# EAGLE board pov-yoyo-0.1 (EAGLE 5.11)
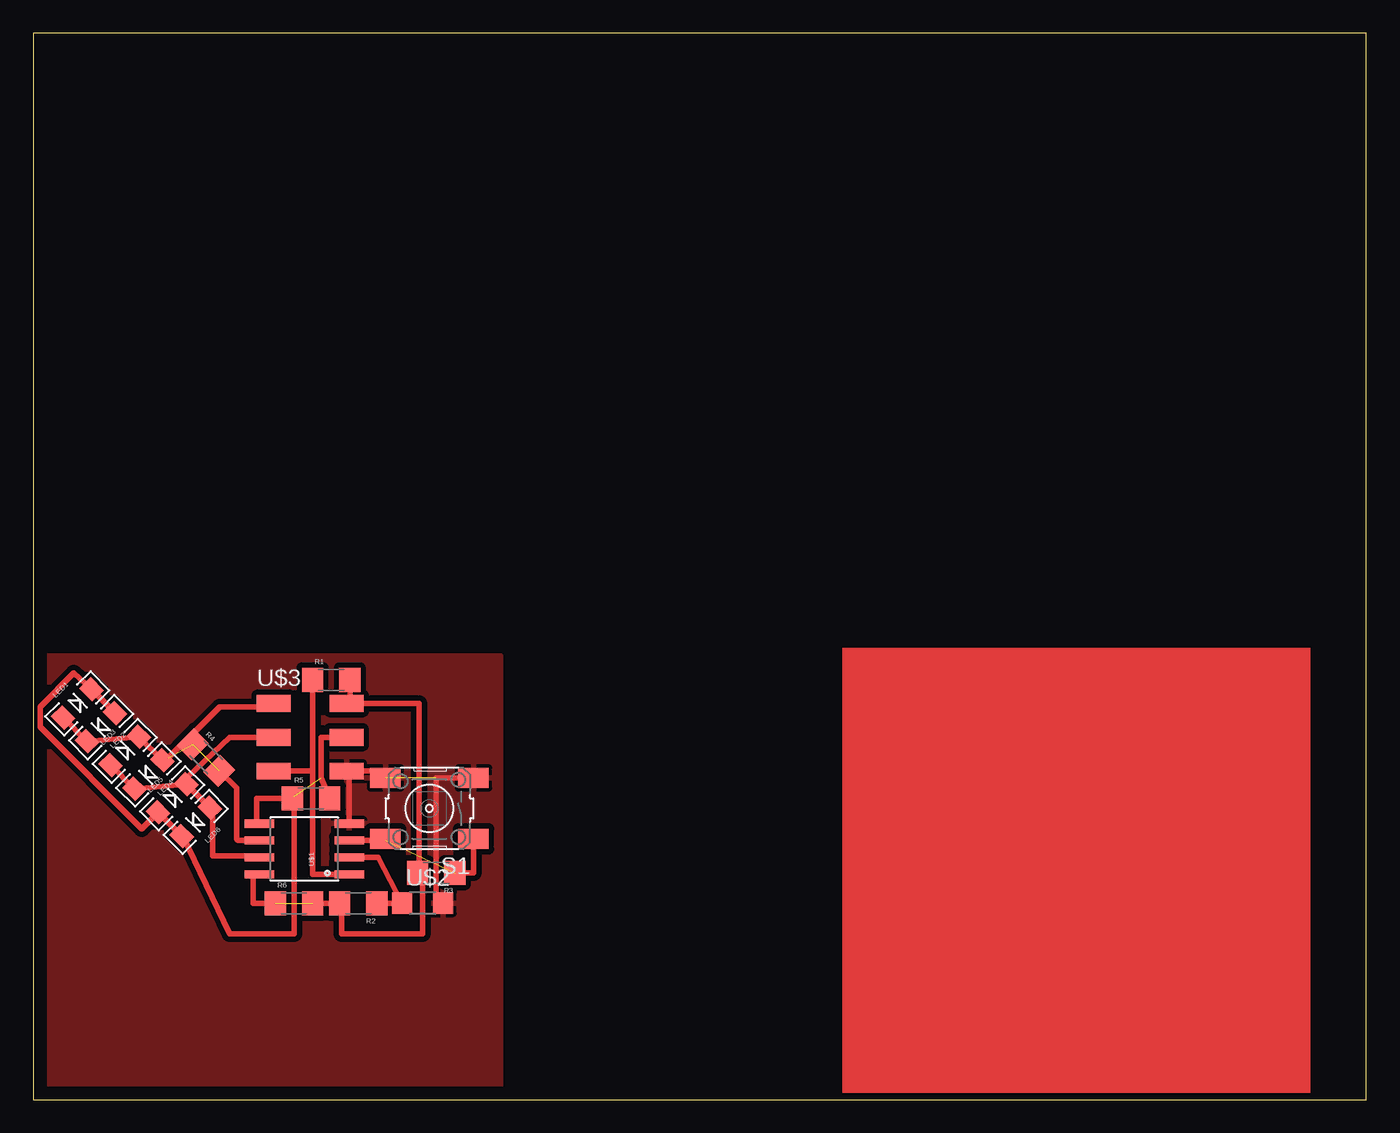
[diagram p0: board, top side]

Size 100 x 80 mm. Coordinates in mm from the lower left corner, seen from the top.
Outline: 0,0 100,0 100,80 0,80 0,0
Copper layers (1*16): Top 0.035mm / dielectric 1.5mm / Bottom 0.035mm
Design rules "default": minimum track width 10mil, minimum drill 24mil, track to track 8mil, track to pad 8mil, pad to pad 8mil, via to via 8mil, smd to smd 8mil, copper to edge 40mil, drill to drill 8mil, minimum pad ring 10mil, minimum via ring 8mil, stop-mask expansion 4mil, vias tented up to drill 0mil, thermal gap 10mil

## Footprints (pad centres in the part's own frame; a part is rotated, then mirrored left to right if it is on the bottom)
LED-1206 = smd 1.2 x 1.4: A -1.5,0; C 1.5,0
1206 = smd 1.6 x 1.8: 1 -1.4,0; 2 1.4,0
6MM_SWITCH = smd 2.286 x 1.524: 1 -3.302,2.286; 2 3.302,2.286; 3 -3.302,-2.286; 4 3.302,-2.286
SO08-EIAJ = smd 0.61 x 2.21: 1 -1.905,-3.378; 2 -0.635,-3.378; 3 0.635,-3.378; 4 1.905,-3.378; 5 1.905,3.353; 6 0.635,3.353; 7 -0.635,3.353; 8 -1.905,3.353
OP1206 = smd 1.5 x 1.6: COLLECTOR -1.55,0; EMITTER 1.55,0
2X03SMD = smd 2.54 x 1.27: 1 -2.54,2.54; 2 2.92,2.54; 3 -2.54,0; 4 2.92,0; 5 -2.54,-2.54; 6 2.92,-2.54

## Placement (x,y rotation side)
LED1  [LED-1206]  3.3,29.72 45 top
LED2  [LED-1206]  5.08,27.94 225 top
LED3  [LED-1206]  6.86,26.16 45 top
LED4  [LED-1206]  8.64,24.38 225 top
LED5  [LED-1206]  10.41,22.61 45 top
LED6  [LED-1206]  12.19,20.83 225 top
R1  10k  [1206]  22.35,31.5 0 top
R2  49.9k  [1206]  24.38,14.73 180 top
R3  10k  [1206]  30.23,17.02 180 top
R4  0  [1206]  12.95,25.65 315.1 top
R5  0  [1206]  20.83,22.61 0 top
R6  0  [1206]  19.56,14.73 0 top
S1  [6MM_SWITCH]  29.72,21.84 180 top
U$1  ATTINY45  [SO08-EIAJ]  20.32,18.8 90 top
U$2  PHOTOTRANSISTOR-NPN1206  [OP1206]  29.21,14.73 0 top
U$3  AVRISPSMD  [2X03SMD]  20.57,27.18 0 top

## Library data of the parts
LED1-LED6 R1-R6 U$1 = SparkFun
S1 U$2 U$3 = fab

## Nets
BUTTON: R3.1 S1.1 S1.2 U$1.3
GND: S1.3 S1.4 U$1.4 U$2.EMITTER U$3.6
MISO: LED1.A LED2.C LED3.C LED4.A R4.1 R4.2 U$1.6 U$3.1
MOSI: LED1.C LED2.A LED5.A LED6.C R5.1 R5.2 U$1.5 U$3.4
PHOTO: R2.1 U$1.2 U$2.COLLECTOR
RST: R1.1 U$1.1 U$3.5
SCK: LED3.A LED4.C LED5.C LED6.A U$1.7 U$3.3
VCC: R1.2 R2.2 R3.2 R6.1 R6.2 U$1.8 U$3.2

## Tracks (layer width: path | path; a pad name or v marks a point on that pad's centre or on a via)
BUTTON  (1 unrouted)
  Top 0.406: R3.1 33.02,17.02 S1.1 | U$1.3 26.42,19.43 S1.2
GND  (1 unrouted)
  Top 0.406: S1.4 26.42,24.64 U$3.6 23.7,24.64 U$1.4 | U$2.EMITTER 30.23,14.73 30.23,24.13 S1.3
  pour Top (isolate 0.406): 0,0 34.42,0 arc90 35.05,0.64 35.05,33.27 0.64,33.27 arc90 0,32.64
MISO  (2 unrouted)
  Top 0.406: LED1.A LED2.C LED3.C LED4.A arc45 10.13,25.62 13.97,29.46 17.52,29.46 arc45 17.97,29.65 U$3.1 | R4.2 15.24,23.37 15.24,19.56 15.37,19.43 U$1.6
MOSI  (1 unrouted)
  Top 0.406: 6.35,29.21 LED2.A LED1.C 3.05,32 0.51,29.46 0.51,27.94 8.13,20.32 LED5.A LED6.C 11.22,19.77 14.73,12.45 19.56,12.45 19.56,22.73 R5.1 16.76,22.61 16.76,20.7 U$1.5 | R5.2 21.59,24.13 21.59,27.18 U$3.4
PHOTO
  Top 0.406: U$1.2 25.88,18.16 U$2.COLLECTOR R2.1
RST
  Top 0.406: U$1.1 20.95,16.89 20.95,24.64 | 20.95,24.64 R1.1 | 20.95,24.64 U$3.5
SCK
  Top 0.406: LED3.A LED4.C 10.94,23.62 | 10.94,23.62 LED5.C LED6.A arc-90 13.46,21.68 13.46,18.29 16.84,18.29 arc-90 U$1.7 | U$3.3 14.73,27.18 10.94,23.62
VCC  (1 unrouted)
  Top 0.406: 16.76,16.89 U$1.8 16.51,16.89 16.51,14.73 R6.1 | R6.2 R2.2 23.11,14.73 23.11,12.45 29.21,12.45 29.21,17.02 R3.2 28.96,17.02 28.96,29.72 U$3.2 23.75,29.72 R1.2
(copper drawn outside any net)
  shapes: Top area x1